# EAGLE board vending-machine-v2-optosensor-r1-panelized (EAGLE 5.11)
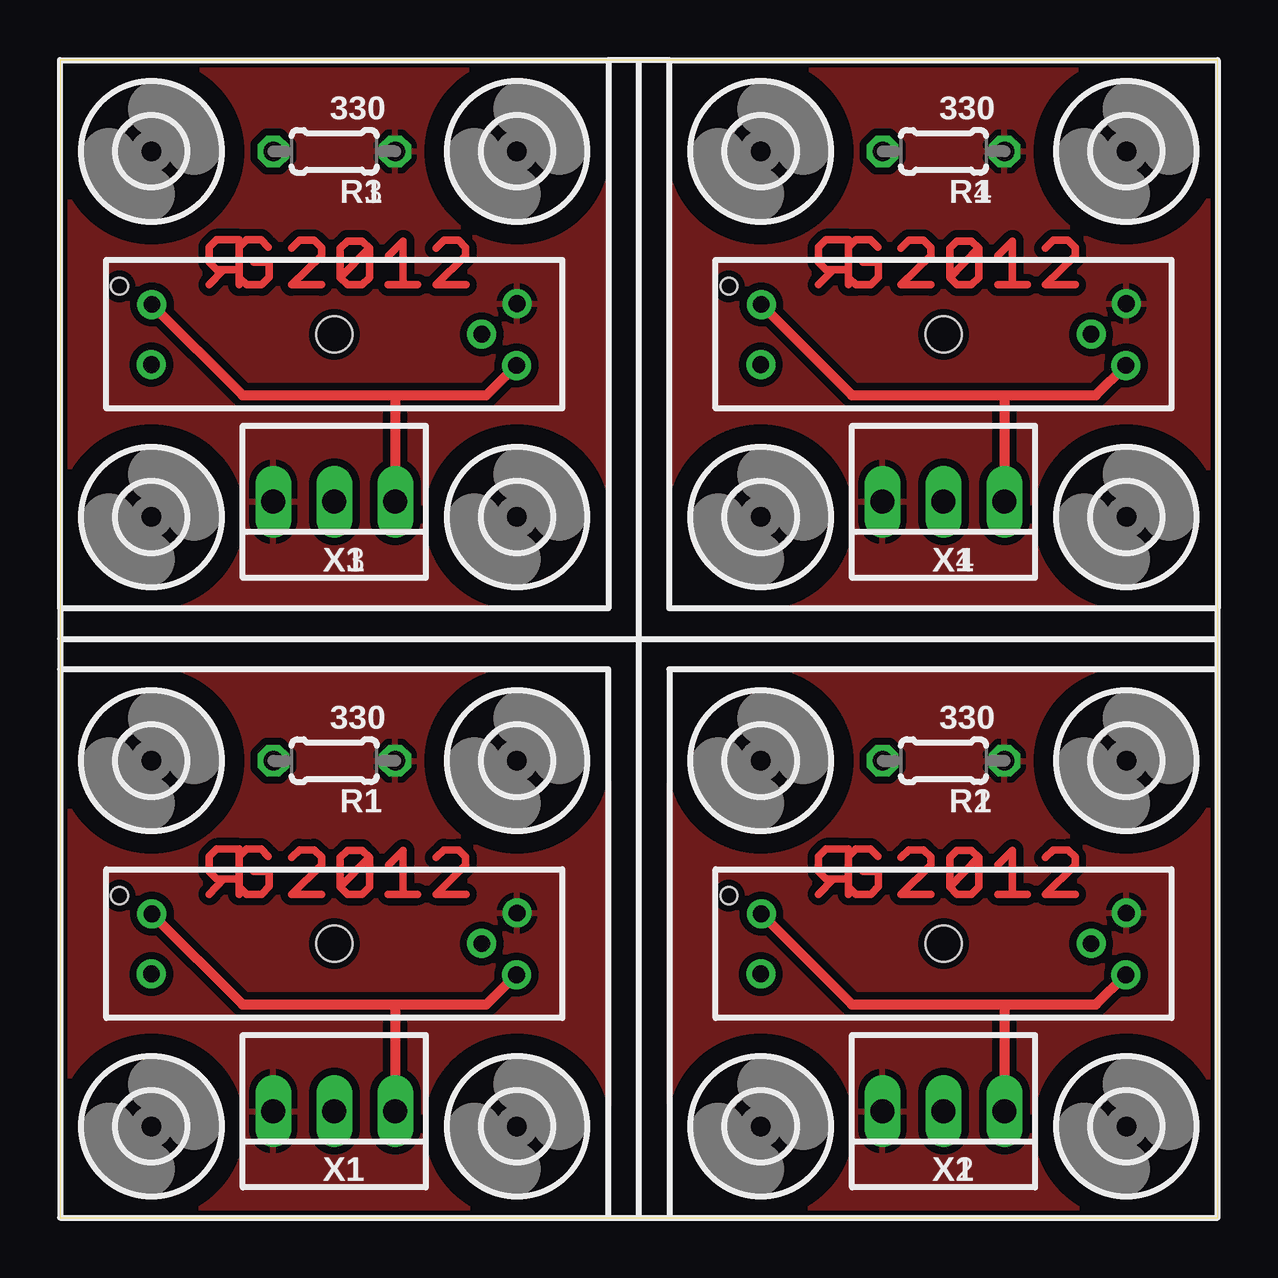
[diagram p0: board, top side]
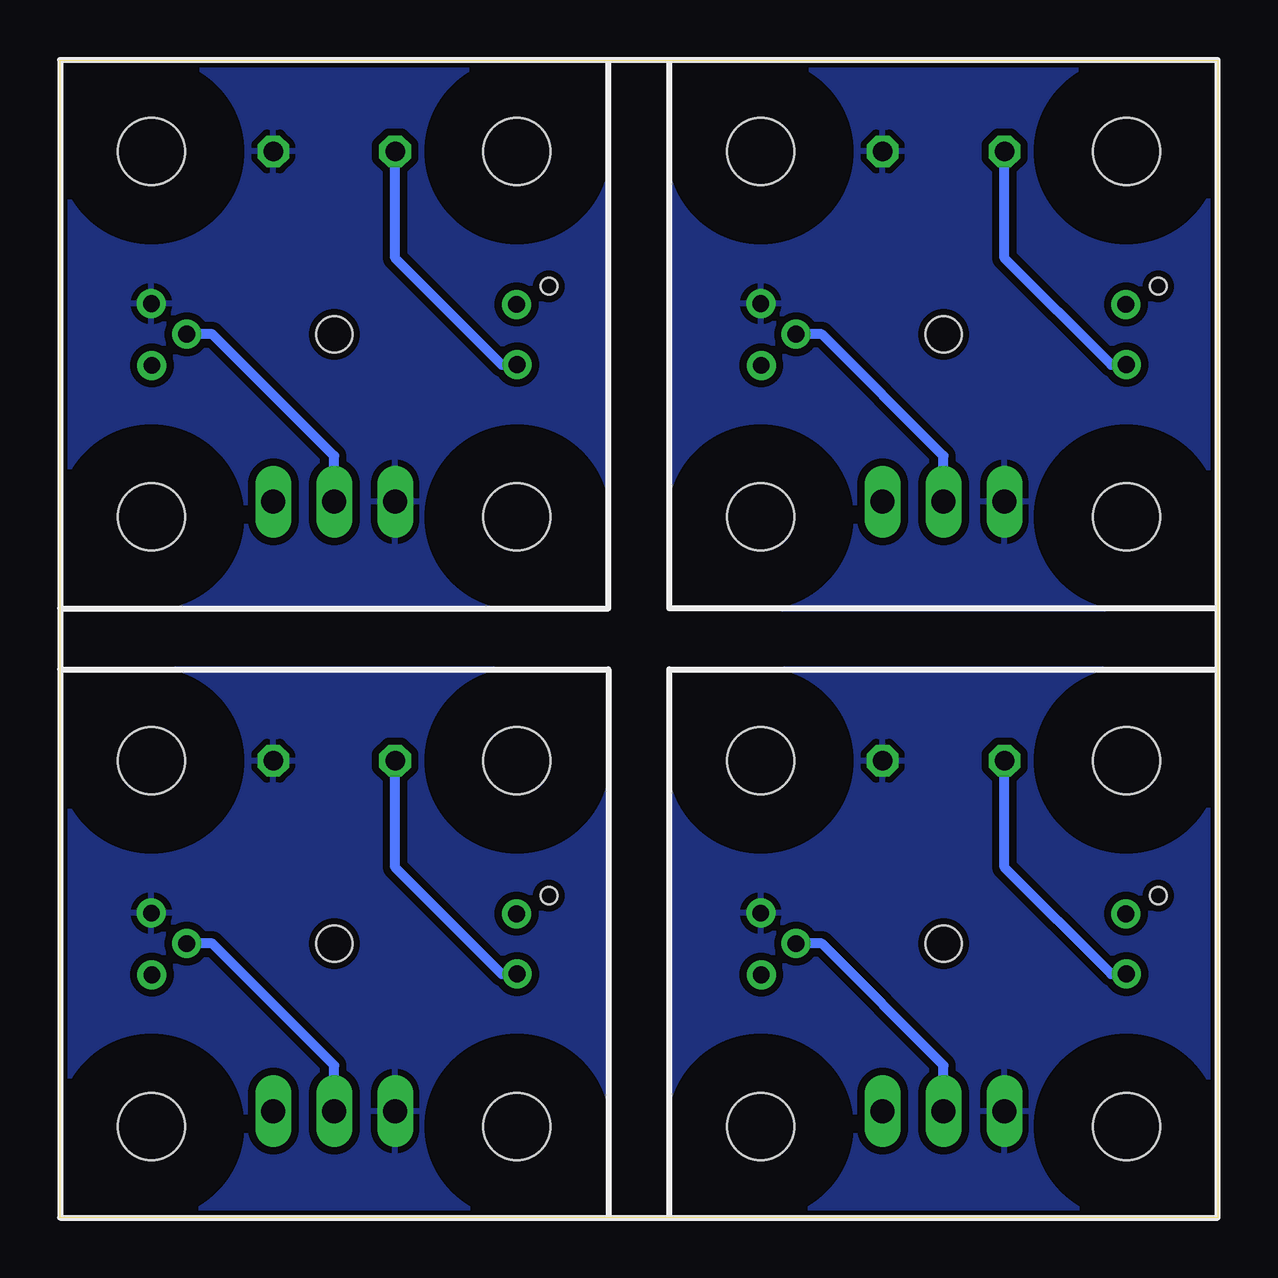
[diagram p1: board, bottom side, seen from below]

Size 48.26 x 48.26 mm. Coordinates in mm from the lower left corner, seen from the top.
Outline: 0,0 48.26,0 48.26,48.26 0,48.26 0,0
Copper layers (1*16): Top 0.035mm / dielectric 1.5mm / Bottom 0.035mm
Design rules "default *": minimum track width 10mil, minimum drill 24mil, track to track 8mil, track to pad 8mil, pad to pad 8mil, via to via 8mil, smd to smd 8mil, copper to edge 10mil, drill to drill 8mil, minimum pad ring 10mil, minimum via ring 8mil, stop-mask expansion 4mil, vias tented up to drill 0mil, thermal gap 10mil

## Footprints (pad centres in the part's own frame; a part is rotated, then mirrored left to right if it is on the bottom)
2,8 = hole 2.8: 0,0
GP1A57HR = drill 0.7 round: 1 -7.6,1.24; 2 -7.62,-1.27; 3 7.6,-1.3; 4 6.15,0; 5 7.62,1.27 | hole 1.5: 0,0 | hole 0.7: -8.95,2
0204/5 = drill 0.813 octagon: 1 -2.54,0; 2 2.54,0
22-23-2031 = drill 1 long: 1 -2.54,0; 2 0,0; 3 2.54,0

## Placement (x,y rotation side)
H1  MOUNT-HOLE2.8  [2,8]  3.81,19.05 0 top
H2  MOUNT-HOLE2.8  [2,8]  19.05,19.05 0 top
H3  MOUNT-HOLE2.8  [2,8]  19.05,3.81 0 top
H4  MOUNT-HOLE2.8  [2,8]  3.81,3.81 0 top
H5  MOUNT-HOLE2.8  [2,8]  29.21,19.05 0 top
H6  MOUNT-HOLE2.8  [2,8]  44.45,19.05 0 top
H7  MOUNT-HOLE2.8  [2,8]  44.45,3.81 0 top
H8  MOUNT-HOLE2.8  [2,8]  29.21,3.81 0 top
H9  MOUNT-HOLE2.8  [2,8]  3.81,44.45 0 top
H10  MOUNT-HOLE2.8  [2,8]  19.05,44.45 0 top
H11  MOUNT-HOLE2.8  [2,8]  19.05,29.21 0 top
H12  MOUNT-HOLE2.8  [2,8]  3.81,29.21 0 top
H13  MOUNT-HOLE2.8  [2,8]  29.21,44.45 0 top
H14  MOUNT-HOLE2.8  [2,8]  44.45,44.45 0 top
H15  MOUNT-HOLE2.8  [2,8]  44.45,29.21 0 top
H16  MOUNT-HOLE2.8  [2,8]  29.21,29.21 0 top
IC1  GP1A57HR  [GP1A57HR]  11.43,11.43 0 top
IC2  GP1A57HR  [GP1A57HR]  36.83,11.43 0 top
IC3  GP1A57HR  [GP1A57HR]  11.43,36.83 0 top
IC4  GP1A57HR  [GP1A57HR]  36.83,36.83 0 top
R1  330  [0204/5]  11.43,19.05 180 top
R2  330  [0204/5]  36.83,19.05 180 top
R3  330  [0204/5]  11.43,44.45 180 top
R4  330  [0204/5]  36.83,44.45 180 top
U$1  [RGLOGO_SMALL_2012]  7.62,13.34 0 top
U$2  [RGLOGO_SMALL_2012]  33.02,13.34 0 top
U$3  [RGLOGO_SMALL_2012]  7.62,38.73 0 top
U$4  [RGLOGO_SMALL_2012]  33.02,38.73 0 top
X1  22-23-2031  [22-23-2031]  11.43,4.45 180 top
X2  22-23-2031  [22-23-2031]  36.83,4.45 180 top
X3  22-23-2031  [22-23-2031]  11.43,29.84 180 top
X4  22-23-2031  [22-23-2031]  36.83,29.84 180 top

## Library data of the parts
H1-H16 = holes
IC1-IC4 = SparkFun
R1-R4 = rcl
U$1-U$4 = rbg-logos
X1-X4 = con-molex; MF: MOLEX; MPN: 22-23-2031; OC_FARNELL: 1462950; OC_NEWARK: 30C0862

## Nets
+5V: IC1.1 IC1.3 X1.1
+5V1: IC2.1 IC2.3 X2.1
+5V2: IC3.1 IC3.3 X3.1
+5V3: IC4.1 IC4.3 X4.1
DETECTED_SIGNAL: IC1.4 X1.2
DETECTED_SIGNAL1: IC2.4 X2.2
DETECTED_SIGNAL2: IC3.4 X3.2
DETECTED_SIGNAL3: IC4.4 X4.2
GND: IC1.5 R1.1 X1.3
GND1: IC2.5 R2.1 X2.3
GND2: IC3.5 R3.1 X3.3
GND3: IC4.5 R4.1 X4.3
N$1: IC2.2 R2.2
N$2: IC3.2 R3.2
N$3: IC4.2 R4.2
N$8: IC1.2 R1.2

## Tracks (layer width: path | path; a pad name or v marks a point on that pad's centre or on a via)
+5V
  Top 0.406: IC1.3 17.78,8.89 13.97,8.89 | 13.97,8.89 7.61,8.89 IC1.1 | 13.97,8.89 X1.1
+5V1
  Top 0.406: IC2.3 43.18,8.89 39.37,8.89 | 39.37,8.89 33.01,8.89 IC2.1 | 39.37,8.89 X2.1
+5V2
  Top 0.406: IC3.3 17.78,34.29 13.97,34.29 | 13.97,34.29 7.61,34.29 IC3.1 | 13.97,34.29 X3.1
+5V3
  Top 0.406: IC4.3 43.18,34.29 39.37,34.29 | 39.37,34.29 33.01,34.29 IC4.1 | 39.37,34.29 X4.1
DETECTED_SIGNAL
  Bottom 0.406: IC1.4 16.51,11.43 11.43,6.35 X1.2
DETECTED_SIGNAL1
  Bottom 0.406: IC2.4 41.91,11.43 36.83,6.35 X2.2
DETECTED_SIGNAL2
  Bottom 0.406: IC3.4 16.51,36.83 11.43,31.75 X3.2
DETECTED_SIGNAL3
  Bottom 0.406: IC4.4 41.91,36.83 36.83,31.75 X4.2
GND
  pour Bottom (isolate 0.305): 0,22.86 22.86,22.86 22.86,0 0,0
  pour Top (isolate 0.305): 0,22.86 22.86,22.86 22.86,0 0,0
GND1
  pour Bottom (isolate 0.305): 25.4,22.86 48.26,22.86 48.26,0 25.4,0
  pour Top (isolate 0.305): 25.4,22.86 48.26,22.86 48.26,0 25.4,0
GND2
  pour Bottom (isolate 0.305): 0,48.26 22.86,48.26 22.86,25.4 0,25.4
  pour Top (isolate 0.305): 0,48.26 22.86,48.26 22.86,25.4 0,25.4
GND3
  pour Bottom (isolate 0.305): 25.4,48.26 48.26,48.26 48.26,25.4 25.4,25.4
  pour Top (isolate 0.305): 25.4,48.26 48.26,48.26 48.26,25.4 25.4,25.4
N$1
  Bottom 0.406: IC2.2 29.84,10.16 34.29,14.61 R2.2
N$2
  Bottom 0.406: IC3.2 4.45,35.56 8.89,40.01 R3.2
N$3
  Bottom 0.406: IC4.2 29.84,35.56 34.29,40.01 R4.2
N$8
  Bottom 0.406: IC1.2 4.45,10.16 8.89,14.61 R1.2

## Text on the board
_tsilk: 330 | 330 | R1 | R1 | X1 | X1 | 330 | 330 | R1 | R1 | X1 | X1